# Altium PCB CPU-010.PcbDoc
Units mm, origin at the board's own origin, x right, y up, seen from the top; angles counter-clockwise.
Board outline 44.45 x 44.45 mm, 2 copper layers (Top Layer, Bottom Layer), stack 1.595 mm thick; 64 components, 120 nets, 621 pads, 119 vias.
Unrouted connection lines stored in the file: 367.
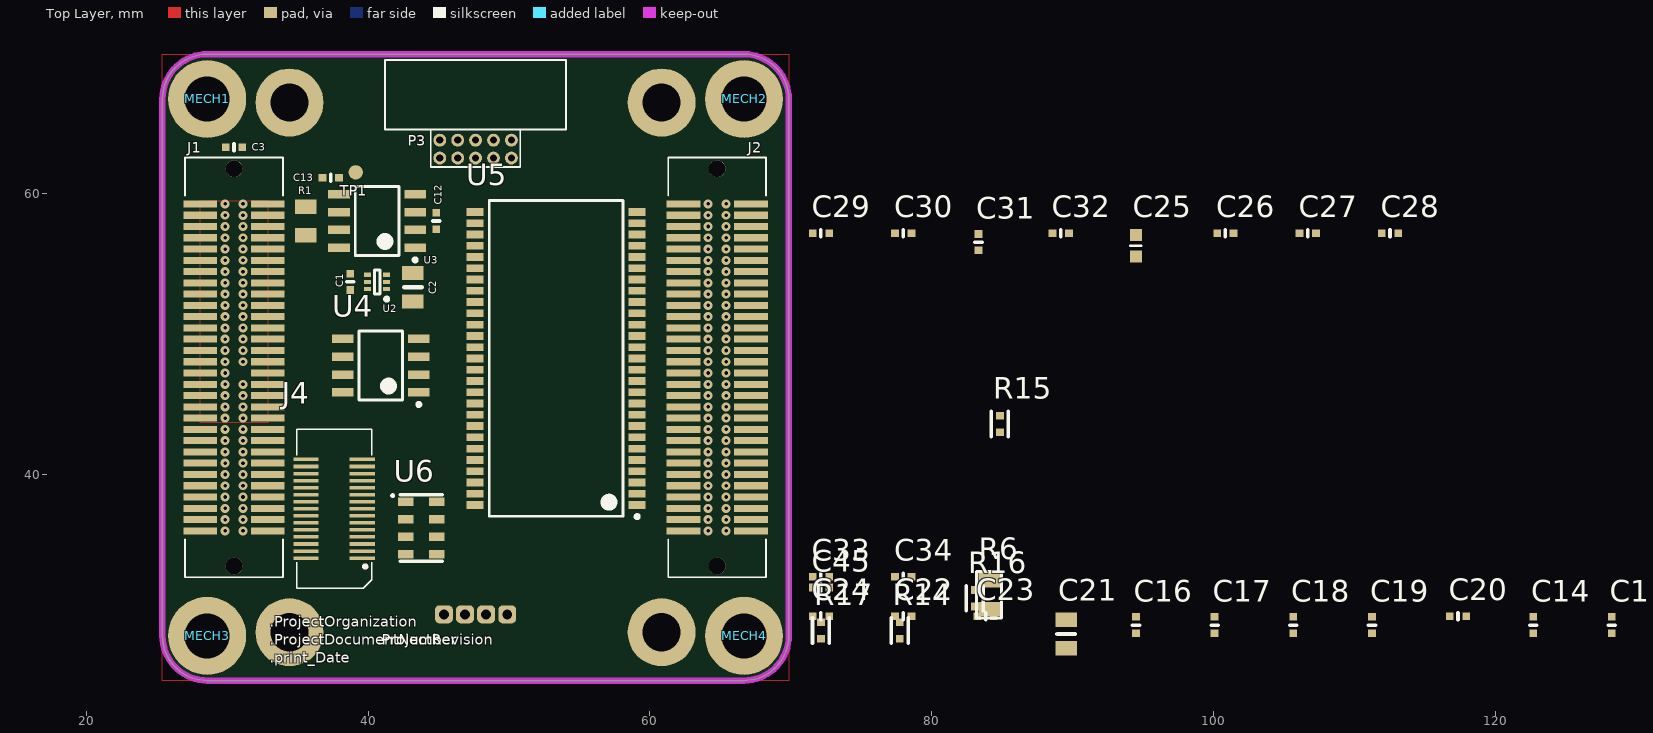
[diagram p0: Top Layer view]
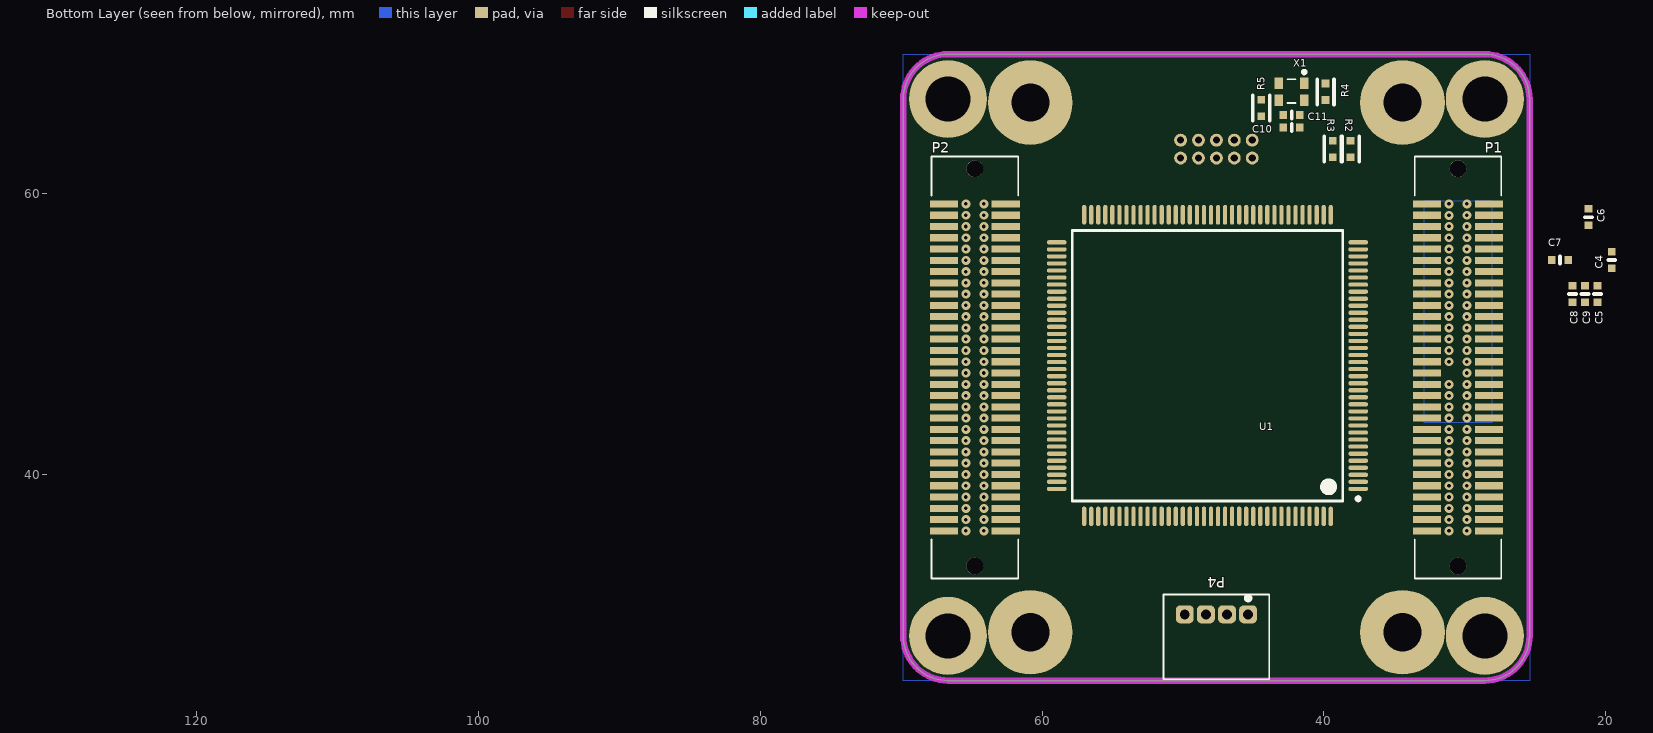
[diagram p1: Bottom Layer view, seen from below]

## Layer stack, top to bottom
Top Solder: solder mask 0.0254, Solder Resist, Dk 3.5
Top Layer: signal copper 0.0356
Dielectric 1: core 1.524, FR-4, Dk 4.6
Bottom Layer: signal copper 0.0356
Bottom Solder: solder mask 0.0254, Solder Resist, Dk 3.5

## Board outline
25.4,28.575 25.4,66.675 cw(c28.575,66.675) 28.575,69.85 66.675,69.85 cw(c66.675,66.675) 69.85,66.675 69.85,28.575 cw(c66.675,28.575) 66.675,25.4 28.575,25.4 cw(c28.575,28.575)

## Design rules (kind name [scope] priority, off if disabled: settings)
AssemblyTestPointUsage AssemblyTestPointUsage_1 [All] p2:
AssemblyTestpoint AssemblyTestpoint_1 [All] p2: testpointundercomponent=TRUE minsize=1.016 maxsize=2.54 preferedsize=1.524 minholesize=0 maxholesize=1.016 preferedholesize=0.813 testpointgrid=0.025 usegrid=TRUE gridtolerance=0 allowsidetop=TRUE allowsidebottom=TRUE
Clearance [All] p1: gap=0.152 ignorepadtopadclearanceinfootprint=FALSE except(0: Arc-Hole Track-Hole SMDPad-Hole THPad-Hole Via-Hole Fill-Hole Poly-Hole Region-Hole Text-Hole)
ComponentClearance [All] p1: gap=0.254 collisioncheckmode=3 verticalgap=0.127 showdistances=FALSE
DiffPairsRouting [All] p1: maxlimit=0.152 minlimit=0.152 mostfreqgap=0.152 toplayer_minwidth=0.508 toplayer_maxwidth=0.508 toplayer_prefwidth=0.508 bottomlayer_minwidth=0.508 bottomlayer_maxwidth=0.508 bottomlayer_prefwidth=0.508 maxuncoupledlength=12.7
FabricationTestPointUsage FabricationTestPointUsage_1 [All] p2: valid=0 allowmultiple=FALSE
FabricationTestpoint FabricationTestpoint_1 [All] p2: side=3 testpointundercomponent=TRUE minsize=1.016 maxsize=2.54 preferedsize=1.524 minholesize=0 maxholesize=1.016 preferedholesize=0.813 testpointgrid=0.025 allowsidetop=TRUE allowsidebottom=TRUE usegrid=TRUE gridtolerance=0
Height Height_Bottom [TouchesRoom('BoardHeight_Bottom') and OnBottom and not ((Name='J1') or (Name='J2') or (Name='P1') or (Name='P2') )] p1: minheight=0 maxheight=3.861 prefheight=0
Height Height_Top [TouchesRoom('BoardHeight_Top') and OnTop and not ((Name='J1') or (Name='J2') or (Name='P1') or (Name='P2') or Name='Mech*' )] p2: minheight=0 maxheight=15.875 prefheight=0
HoleSize [All] p1: absolutevalues=TRUE maxlimit=3.302 minlimit=0.254 maxpercent=80.000 minpercent=20.000
MinimumSolderMaskSliver [All] p1: minsoldermaskwidth=0.076
PolygonConnect [All] p1: thpad.connectstyle=Relief thpad.reliefconductorwidth=0.152 thpad.reliefentries=4 thpad.polygonreliefangle="90 Angle" thpad.airgapwidth=0.152 smdpad.connectstyle=Relief smdpad.reliefconductorwidth=0.152 smdpad.reliefentries=4 smdpad.polygonreliefangle="90 Angle" smdpad.airgapwidth=0.152 via.connectstyle=Direct via.reliefconductorwidth=0.254 via.reliefentries=4 via.polygonreliefangle="90 Angle" via.airgapwidth=0.254
RoomDefinition BoardHeight_Bottom [False] p1: confinementstyle=ConfineIn formatcopy=TRUE lockcomponents=FALSE outline 25.4,69.85 69.85,69.85 69.85,25.4 25.4,25.4
RoomDefinition BoardHeight_Top [False] p2: confinementstyle=ConfineIn formatcopy=TRUE lockcomponents=FALSE outline 69.85,69.85 25.4,69.85 25.4,25.4 69.85,25.4
RoutingVias [All] p1: holewidth=0.254 width=0.635 viastyle="Through Hole" minholewidth=0.254 minwidth=0.635 maxholewidth=0.711 maxwidth=1.27
SilkToBoardRegionClearance SilkToBoardRegionClearance_1 [All] p2:
SilkToSilkClearance [All] p1: silktosilkclearance=0.051
SilkToSolderMaskClearance [IsPad] p1: minsilkscreentomaskgap=0.102 clearancetoexposedcopper=TRUE
SolderMaskExpansion [All] p1: expansion=0.051 istentingtop=FALSE
UnRoutedNet [All] p1: checkbadconnections=TRUE
Width "Schematic Width Constraint_1" [InNet('XTAL')] p1: maxlimit=0.254 minlimit=0.254 preferedwidth=0.254
Width "Schematic Width Constraint" [InNet('NetR5_1')] p2: maxlimit=0.254 minlimit=0.254 preferedwidth=0.254
Width Width_1 [All] p3: maxlimit=2.54 minlimit=0.152 preferedwidth=0.254
22 further rules are at their usual default settings.

## Classes and differential pairs
component class Connectors: C3 C12 C13 J1 J2 P1 P2 P4 R1 U3
component class Power: C4 C5 C6 C7 C8 C9
differential pair CAN1: +CAN1_P -CAN1_N
differential pair CAN0: +CAN0_P -CAN0_N

## Components (designator, comment, footprint, x,y, rotation, side; value= is the part's Value field where it differs from the comment)
C1 "1µF" SMD-0402C 38.735,53.696 r0 top
C2 "4.7µF" SMD-0805C 43.18,53.315 r180 top
C3 "0.10µF" SMD-0402C 30.48,63.246 r270 top
C4 "0.10µF" SMD-0402C 19.558,55.245 r180 bottom
C5 "0.10µF" SMD-0402C 20.574,52.832 r0 bottom
C6 "0.10µF" SMD-0402C 21.209,58.293 r180 bottom
C7 "0.10µF" SMD-0402C 23.241,55.245 r270 bottom
C8 "0.10µF" SMD-0402C 22.352,52.832 r0 bottom
C9 "0.10µF" SMD-0402C 21.463,52.832 r0 bottom
C10 "0.10µF" SMD-0402C 42.291,64.643 r90 bottom
C11 "10000pF" SMD-0402C 42.291,65.532 r90 bottom
C12 "0.10µF" SMD-0402C 44.831,58.014 r0 top
C13 "0.10µF" SMD-0402C 37.338,61.087 r270 top
C14 "1µF" SMD-0402C 122.682,29.337 r0 top
C15 "0.10µF" SMD-0402C 128.27,29.337 r0 top
C16 "0.10µF" SMD-0402C 94.488,29.337 r0 top
C17 "0.10µF" SMD-0402C 100.076,29.337 r0 top
C18 "0.10µF" SMD-0402C 105.664,29.337 r0 top
C19 "0.10µF" SMD-0402C 111.252,29.337 r0 top
C20 "0.10µF" SMD-0402C 117.348,29.972 r90 top
C21 "4.7µF" SMD-0805C 89.535,28.702 r0 top
C22 "0.10µF" SMD-0402C 77.978,29.972 r90 top
C23 "0.10µF" SMD-0402C 83.82,29.972 r90 top
C24 "0.10µF" SMD-0402C 72.136,29.972 r90 top
C25 "2.2µF" SMD-0603C 94.488,56.261 r0 top
C26 "0.10µF" SMD-0402C 100.838,57.15 r90 top
C27 "0.10µF" SMD-0402C 106.68,57.15 r90 top
C28 "0.10µF" SMD-0402C 112.522,57.15 r90 top
C29 "0.10µF" SMD-0402C 72.136,57.15 r90 top
C30 "0.10µF" SMD-0402C 77.978,57.15 r90 top
C31 "0.10µF" SMD-0402C 83.312,56.515 r0 top
C32 "0.10µF" SMD-0402C 89.154,57.15 r90 top
C33 "0.10µF" SMD-0402C 72.136,32.766 r90 top
C34 "0.10µF" SMD-0402C 77.978,32.766 r90 top
C45 "0.10µF" SMD-0402C 72.136,32.004 r90 top
J1 "10144517-064802LF" 10144517-064802LF 30.48,47.625 r90 top locked
J2 "10144517-064802LF" 10144517-064802LF 64.77,47.625 r90 top locked
J4 "52991-0308" 529910308 37.592,37.592 r90 top
MECH1 "M2115-3005-SS" M2115-3005-SS 28.575,66.675 r0 top
MECH2 "M2115-3005-SS" M2115-3005-SS 66.675,66.675 r0 top
MECH3 "M2115-3005-SS" M2115-3005-SS 28.575,28.575 r0 top
MECH4 "M2115-3005-SS" M2115-3005-SS 66.675,28.575 r0 top
P1 "10144518-064802LF" 10144518-064802LF 30.48,47.625 r270 bottom locked
P2 "10144518-064802LF" 10144518-064802LF 64.77,47.625 r270 bottom locked
P3 "2x5_0.05_SWD" 2X5_0.05_R 47.625,62.484 r180 top
P4 "S4B-ZR(LF)(SN)" S4B-ZR(LF)(SN) 47.625,25.499 r180 bottom
R1 "120" SMD-0805-RES 35.56,58.014 r180 top
R2 "10k" SMD-0402-RES 38.1,63.119 r180 bottom
R3 "1k" SMD-0402-RES 39.37,63.119 r180 bottom
R4 "1k" SMD-0402-RES 39.878,67.183 r180 bottom
R5 "22" SMD-0402-RES 44.45,66.04 r180 bottom
R6 "120" SMD-0805-RES 84.074,31.496 r0 top
R14 "4.7k" SMD-0402-RES 77.724,28.956 r0 top
R15 "4.7k" SMD-0402-RES 84.836,43.612 r0 top
R16 "22" SMD-0402-RES 83.058,31.242 r0 top
R17 "22" SMD-0402-RES 72.136,28.956 r0 top
TP1 "TP" TP_SMD_40 39.116,61.468 r90 top
U1 "ATSAMV71Q19B-AAB" TSQFP50P2200X2200X160-144N 48.26,47.752 r0 bottom
U2 "NCV8170AXV330T2G" SOTFL50P160X60-6N 40.64,53.696 r180 top
U3 "ATA6561-GAQW" SOIC127P600X175-8N 40.64,58.014 r180 top
U4 "ATA6561-GAQW" SOIC127P600X175-8N 40.894,47.752 r180 top
U5 "IS45S16800F-7TLA2" TSOP80P1180X120-54N 53.34,48.26 r180 top
U6 "MS561101BA03-50" MS561101BA03-50 43.772,36.225 r0 top
X1 "MC2016K30.0000C16ESH" MC2016 42.291,67.183 r0 bottom

## Footprints (in the part's own frame and the unit in brackets; to place one, negate y for a bottom-side part, rotate by r counter-clockwise, add the part's x,y. Pads: shape width x height; smd on the part's side, far side on the other; paste and mask are expansions set on the pad)
2X5_0.05_R [mil]
  round 36 hole 20: 1(100,0) 2(100,-50) 3(50,0) 4(50,-50) 5(0,0) 6(0,-50) 8(-50,-50) 9(-100,0) 10(-100,-50)
  round 36 hole 20 mask+4: 7(-50,0)
  silkscreen extent -253,-274 253,25, body extent -250,-274 250,8, height 198
10144517-064802LF [mm]
  rect 0.5x2.4 smd: 1(11.6,2.4) 2(11.6,-2.4) 3(10.8,2.4) 4(10.8,-2.4) 5(10,2.4) 6(10,-2.4) 7(9.2,2.4) 8(9.2,-2.4) 9(8.4,2.4) 10(8.4,-2.4) 11(7.6,2.4) 12(7.6,-2.4) 13(6.8,2.4) 14(6.8,-2.4) 15(6,2.4) 16(6,-2.4) 17(5.2,2.4) 18(5.2,-2.4) 19(4.4,2.4) 20(4.4,-2.4) 21(3.6,2.4) 22(3.6,-2.4) 23(2.8,2.4) 24(2.8,-2.4) 25(2,2.4) 26(2,-2.4) 27(1.2,2.4) 28(1.2,-2.4) 29(0.4,2.4) 30(0.4,-2.4) 31(-0.4,2.4) 32(-0.4,-2.4) 33(-1.2,2.4) 34(-1.2,-2.4) 35(-2,2.4) 36(-2,-2.4) 37(-2.8,2.4) 38(-2.8,-2.4) 39(-3.6,2.4) 40(-3.6,-2.4) 41(-4.4,2.4) 42(-4.4,-2.4) 43(-5.2,2.4) 44(-5.2,-2.4) 45(-6,2.4) 46(-6,-2.4) 47(-6.8,2.4) 48(-6.8,-2.4) 49(-7.6,2.4) 50(-7.6,-2.4) 51(-8.4,2.4) 52(-8.4,-2.4) 53(-9.2,2.4) 54(-9.2,-2.4) 55(-10,2.4) 56(-10,-2.4) 57(-10.8,2.4) 58(-10.8,-2.4) 59(-11.6,2.4) 60(-11.6,-2.4)
  round 1.2 hole 1.2 unplated: M1(14.1,0)
  round 0.8 hole 0.8 unplated: M2(-14.1,0)
  silkscreen extent -14.9,-3.47 14.9,3.47, body extent -14.9,-3.4 14.9,3.4, height 15.65
10144518-064802LF [mm]
  rect 0.5x2 smd: 1(-11.6,2.2) 2(-11.6,-2.2) 3(-10.8,2.2) 4(-10.8,-2.2) 5(-10,2.2) 6(-10,-2.2) 7(-9.2,2.2) 8(-9.2,-2.2) 9(-8.4,2.2) 10(-8.4,-2.2) 11(-7.6,2.2) 12(-7.6,-2.2) 13(-6.8,2.2) 14(-6.8,-2.2) 15(-6,2.2) 16(-6,-2.2) 17(-5.2,2.2) 18(-5.2,-2.2) 19(-4.4,2.2) 20(-4.4,-2.2) 21(-3.6,2.2) 22(-3.6,-2.2) 23(-2.8,2.2) 24(-2.8,-2.2) 25(-2,2.2) 26(-2,-2.2) 27(-1.2,2.2) 28(-1.2,-2.2) 29(-0.4,2.2) 30(-0.4,-2.2) 31(0.4,2.2) 32(0.4,-2.2) 33(1.2,2.2) 34(1.2,-2.2) 35(2,2.2) 36(2,-2.2) 37(2.8,2.2) 38(2.8,-2.2) 39(3.6,2.2) 40(3.6,-2.2) 41(4.4,2.2) 42(4.4,-2.2) 43(5.2,2.2) 44(5.2,-2.2) 45(6,2.2) 46(6,-2.2) 47(6.8,2.2) 48(6.8,-2.2) 49(7.6,2.2) 50(7.6,-2.2) 51(8.4,2.2) 52(8.4,-2.2) 53(9.2,2.2) 54(9.2,-2.2) 55(10,2.2) 56(10,-2.2) 57(10.8,2.2) 58(10.8,-2.2) 59(11.6,2.2) 60(11.6,-2.2)
  round 1.2 hole 1.2 unplated: M2(14.1,0)
  silkscreen extent -14.97,-3.08 14.97,3.08, body extent -14.9,-3 14.9,3, height 7.65
529910308 [mm]
  rect 0.25x1.8 smd: 1(-3.5,-2) 2(-3.5,2) 3(-3,-2) 4(-3,2) 5(-2.5,-2) 6(-2.5,2) 7(-2,-2) 8(-2,2) 9(-1.5,-2) 10(-1.5,2) 11(-1,-2) 12(-1,2) 13(-0.5,-2) 14(-0.5,2) 15(0,-2) 16(0,2) 17(0.5,-2) 18(0.5,2) 19(1,-2) 20(1,2) 21(1.5,-2) 22(1.5,2) 23(2,-2) 24(2,2) 25(2.5,-2) 26(2.5,2) 27(3,-2) 28(3,2) 29(3.5,-2) 30(3.5,2)
  silkscreen extent -5.65,-2.65 5.65,2.65, body extent -5.65,-2.7 5.65,2.7, height 2.33
M2115-3005-SS [mm]
  body extent -2.25,-2.59 2.25,2.59, height 20
MC2016 [mm]
  rect 0.6x0.8 smd: 1(-0.9,-0.6) 2(0.9,-0.6) 3(0.9,0.6) 4(-0.9,0.6)
  silkscreen extent -1,-1.5 0.3,0.8, body extent -1,-0.8 1,0.8, height 0.4
MS561101BA03-50 [mm]
  rect 1.1x0.6 smd: 1(-1.1,1.875) 2(-1.1,0.625) 3(-1.1,-0.625) 4(-1.1,-1.875) 5(1.1,-1.875) 6(1.1,-0.625) 7(1.1,0.625) 8(1.1,1.875)
  silkscreen extent -2.08,-2.35 1.5,2.35, body extent -1.5,-2.5 1.5,2.5, height 1
S4B-ZR(LF)(SN) [mm]
  rrect50% 1.27x1.27 hole 0.7: 1(2.25,4.6) 2(0.75,4.6) 3(-0.75,4.6) 4(-2.25,4.6)
  silkscreen extent -3.75,0 3.75,6, body extent -3.75,0 3.75,6, height 3.7
SMD-0402-RES [mm]
  rect 0.55x0.55 smd: 1(0,0.584) 2(0,-0.584)
  silkscreen extent -0.6,-0.9 0.6,0.9, body extent -0.27,-0.57 0.28,0.58, height 0.41
SMD-0402C [mm]
  rect 0.55x0.55 smd: 1(0,0.584) 2(0,-0.584)
  silkscreen extent -0.25,0 0.25,0, body extent -0.25,-0.51 0.25,0.51, height 0.51
SMD-0603C [mm]
  rect 0.85x0.85 smd: 1(0,0.775) 2(0,-0.775)
  silkscreen extent -0.4,0 0.4,0, body extent -0.4,-0.8 0.4,0.8, height 0.9
SMD-0805-RES [mil]
  rect 60x40 smd: 1(0,40) 2(0,-40)
  body extent -24,-39 26,39, height 31
SMD-0805C [mil]
  rect 60x40 smd: 1(0,40) 2(0,-40)
  silkscreen extent -25,0 25,0, body extent -25,-39 25,39, height 35
SOIC127P600X175-8N [mm] "SOIC, 8-Leads, Body 4.90x3.90mm, Pitch 1.27mm, IPC Medium Density"
  rect 1.55x0.6 smd: 1(-2.7,1.905) 2(-2.7,0.635) 3(-2.7,-0.635) 4(-2.7,-1.905) 5(2.7,-1.905) 6(2.7,-0.635) 7(2.7,0.635) 8(2.7,1.905)
  silkscreen extent -2.83,-2.45 1.55,2.88, body extent -3,-2.45 3,2.45, height 1.75
SOTFL50P160X60-6N [mm] "SOTFL, 6-Leads, Body 1.60x1.60mm, Pitch 0.50mm, IPC Medium Density"
  rect 0.5x0.3 smd mask+0.051: 1(-0.675,0.5) 2(-0.675,0) 3(-0.675,-0.5) 4(0.675,-0.5) 5(0.675,0) 6(0.675,0.5)
  silkscreen extent -0.8,-0.85 0.2,1.35, body extent -0.8,-0.85 0.8,0.85, height 0.6
TP_SMD_40 [mil]
  round 40 smd: 1(0,0)
TSOP80P1180X120-54N [mm] "TSOP, 54-Leads, Body 22.22x10.16mm, Pitch 0.80mm, IPC Medium Density"
  rect 1.2x0.55 smd: 1(-5.75,10.4) 2(-5.75,9.6) 3(-5.75,8.8) 4(-5.75,8) 5(-5.75,7.2) 6(-5.75,6.4) 7(-5.75,5.6) 8(-5.75,4.8) 9(-5.75,4) 10(-5.75,3.2) 11(-5.75,2.4) 12(-5.75,1.6) 13(-5.75,0.8) 14(-5.75,0) 15(-5.75,-0.8) 16(-5.75,-1.6) 17(-5.75,-2.4) 18(-5.75,-3.2) 19(-5.75,-4) 20(-5.75,-4.8) 21(-5.75,-5.6) 22(-5.75,-6.4) 23(-5.75,-7.2) 24(-5.75,-8) 25(-5.75,-8.8) 26(-5.75,-9.6) 27(-5.75,-10.4) 28(5.75,-10.4) 29(5.75,-9.6) 30(5.75,-8.8) 31(5.75,-8) 32(5.75,-7.2) 33(5.75,-6.4) 34(5.75,-5.6) 35(5.75,-4.8) 36(5.75,-4) 37(5.75,-3.2) 38(5.75,-2.4) 39(5.75,-1.6) 40(5.75,-0.8) 41(5.75,0) 42(5.75,0.8) 43(5.75,1.6) 44(5.75,2.4) 45(5.75,3.2) 46(5.75,4) 47(5.75,4.8) 48(5.75,5.6) 49(5.75,6.4) 50(5.75,7.2) 51(5.75,8) 52(5.75,8.8) 53(5.75,9.6) 54(5.75,10.4)
  silkscreen extent -5.88,-11.2 4.75,11.35, body extent -5.15,-11.2 5.15,11.2, height 1.2
TSQFP50P2200X2200X160-144N [mm] "TSQFP, 144-Leads, Body 20.00x20.00mm, Pitch 0.50mm, IPC Medium Density"
  oval 1.4x0.3 smd: 1(-10.7,8.75) 2(-10.7,8.25) 3(-10.7,7.75) 4(-10.7,7.25) 5(-10.7,6.75) 6(-10.7,6.25) 7(-10.7,5.75) 8(-10.7,5.25) 9(-10.7,4.75) 10(-10.7,4.25) 11(-10.7,3.75) 12(-10.7,3.25) 13(-10.7,2.75) 14(-10.7,2.25) 15(-10.7,1.75) 16(-10.7,1.25) 17(-10.7,0.75) 18(-10.7,0.25) 19(-10.7,-0.25) 20(-10.7,-0.75) 21(-10.7,-1.25) 22(-10.7,-1.75) 23(-10.7,-2.25) 24(-10.7,-2.75) 25(-10.7,-3.25) 26(-10.7,-3.75) 27(-10.7,-4.25) 28(-10.7,-4.75) 29(-10.7,-5.25) 30(-10.7,-5.75) 31(-10.7,-6.25) 32(-10.7,-6.75) 33(-10.7,-7.25) 34(-10.7,-7.75) 35(-10.7,-8.25) 36(-10.7,-8.75) 73(10.7,-8.75) 74(10.7,-8.25) 75(10.7,-7.75) 76(10.7,-7.25) 77(10.7,-6.75) 78(10.7,-6.25) 79(10.7,-5.75) 80(10.7,-5.25) 81(10.7,-4.75) 82(10.7,-4.25) 83(10.7,-3.75) 84(10.7,-3.25) 85(10.7,-2.75) 86(10.7,-2.25) 87(10.7,-1.75) 88(10.7,-1.25) 89(10.7,-0.75) 90(10.7,-0.25) 91(10.7,0.25) 92(10.7,0.75) 93(10.7,1.25) 94(10.7,1.75) 95(10.7,2.25) 96(10.7,2.75) 97(10.7,3.25) 98(10.7,3.75) 99(10.7,4.25) 100(10.7,4.75) 101(10.7,5.25) 102(10.7,5.75) 103(10.7,6.25) 104(10.7,6.75) 105(10.7,7.25) 106(10.7,7.75) 107(10.7,8.25) 108(10.7,8.75)
  oval 0.3x1.4 smd: 37(-8.75,-10.7) 38(-8.25,-10.7) 39(-7.75,-10.7) 40(-7.25,-10.7) 41(-6.75,-10.7) 42(-6.25,-10.7) 43(-5.75,-10.7) 44(-5.25,-10.7) 45(-4.75,-10.7) 46(-4.25,-10.7) 47(-3.75,-10.7) 48(-3.25,-10.7) 49(-2.75,-10.7) 50(-2.25,-10.7) 51(-1.75,-10.7) 52(-1.25,-10.7) 53(-0.75,-10.7) 54(-0.25,-10.7) 55(0.25,-10.7) 56(0.75,-10.7) 57(1.25,-10.7) 58(1.75,-10.7) 59(2.25,-10.7) 60(2.75,-10.7) 61(3.25,-10.7) 62(3.75,-10.7) 63(4.25,-10.7) 64(4.75,-10.7) 65(5.25,-10.7) 66(5.75,-10.7) 67(6.25,-10.7) 68(6.75,-10.7) 69(7.25,-10.7) 70(7.75,-10.7) 71(8.25,-10.7) 72(8.75,-10.7) 109(8.75,10.7) 110(8.25,10.7) 111(7.75,10.7) 112(7.25,10.7) 113(6.75,10.7) 114(6.25,10.7) 115(5.75,10.7) 116(5.25,10.7) 117(4.75,10.7) 118(4.25,10.7) 119(3.75,10.7) 120(3.25,10.7) 121(2.75,10.7) 122(2.25,10.7) 123(1.75,10.7) 124(1.25,10.7) 125(0.75,10.7) 126(0.25,10.7) 127(-0.25,10.7) 128(-0.75,10.7) 129(-1.25,10.7) 130(-1.75,10.7) 131(-2.25,10.7) 132(-2.75,10.7) 133(-3.25,10.7) 134(-3.75,10.7) 135(-4.25,10.7) 136(-4.75,10.7) 137(-5.25,10.7) 138(-5.75,10.7) 139(-6.25,10.7) 140(-6.75,10.7) 141(-7.25,10.7) 142(-7.75,10.7) 143(-8.25,10.7) 144(-8.75,10.7)
  silkscreen extent -10.82,-9.6 9.6,9.6, body extent -11,-11 11,11, height 1.6

## Part data
C1 C14: library part GCM155C71A105KE38D, "CAP CER 1UF 10V X7S 0402", Digi-Key Part Number=490-13409-1-ND, Manufacturer="Murata Electronics North America", Operating Temperature="-55°C ~ 125°C", Package / Case="0402 (1005 Metric)", Ratings=AEC-Q200, Temperature Coefficient=X7S, Tolerance=±10%, Voltage=10V, @ qty=0, Applications=Automotive, Datasheets=http://www.murata.com/~/media/webrenewal/support/library/catalog/products/capacitor/mlcc/c03e.ashx, Factory Stock=0, Features=-, Height - Seated (Max)=-, Image=//media.digikey.com/Renders/Murata%20Renders/ZRB-SERIES-0402.jpg, Lead Spacing=-, Lead Style=-, Minimum Quantity=1, Mounting Type="Surface Mount, MLCC", Packaging="Cut Tape (CT)", Part Number=GCM155C71A105KE38D, Part Status=Active, Quantity Available=7240, Series=GCM, Size / Dimension="0.039\" L x 0.020\" W (1.00mm x 0.50mm)", Thickness (Max)="0.022\" (0.55mm)", Unit Price (USD)=0.12
C2 C21: library part GCJ21BR71C475KA01L, "CAP CER 4.7UF 16V X7R 0805", Digi-Key Part Number=490-10557-1-ND, Manufacturer="Murata Electronics North America", Operating Temperature="-55°C ~ 125°C", Package / Case="0805 (2012 Metric)", Ratings=AEC-Q200, Temperature Coefficient=X7R, Tolerance=±10%, Voltage=16V, @ qty=0, Applications="Automotive, Boardflex Sensitive", Datasheets=http://www.murata.com/~/media/webrenewal/support/library/catalog/products/capacitor/mlcc/c03e.ashx, Factory Stock=0, Features="Soft Termination", Height - Seated (Max)=-, Image=//media.digikey.com/Renders/Murata%20Renders/0805%20(2012%20Metric)%20.85mm.jpg, Lead Spacing=-, Lead Style=-, Minimum Quantity=1, Mounting Type="Surface Mount, MLCC", Packaging="Cut Tape (CT)", Part Number=GCJ21BR71C475KA01L, Part Status=Active, Quantity Available=53217, Series=GCJ, Size / Dimension="0.079\" L x 0.049\" W (2.00mm x 1.25mm)", Thickness (Max)="0.057\" (1.45mm)", Unit Price (USD)=0.44
C3 C4 C5 C6 C7 C8 C9 C10 C12 C13 C15 C16 C17 C18 C19 C20 C22 C23 C24 C26 C27 C28 C29 C30 C31 C32 C33 C34 C45: library part GCM155R71C104KA55D, "CAP CER 0.1UF 16V X7R 0402", Digi-Key Part Number=490-4759-1-ND, Manufacturer="Murata Electronics North America", Operating Temperature="-55°C ~ 125°C", Package / Case="0402 (1005 Metric)", Ratings=AEC-Q200, Temperature Coefficient=X7R, Tolerance=±10%, Voltage=16V, @ qty=0, Applications=Automotive, Datasheets=http://www.murata.com/~/media/webrenewal/support/library/catalog/products/capacitor/mlcc/c03e.ashx, Factory Stock=0, Features=-, Height - Seated (Max)=-, Image=//media.digikey.com/Renders/Murata%20Renders/ZRB-SERIES-0402.jpg, Lead Spacing=-, Lead Style=-, Minimum Quantity=1, Mounting Type="Surface Mount, MLCC", Packaging="Cut Tape (CT)", Part Number=GCM155R71C104KA55D, Part Status=Active, Quantity Available=734194, Series=GCM, Size / Dimension="0.039\" L x 0.020\" W (1.00mm x 0.50mm)", Thickness (Max)="0.022\" (0.55mm)", Unit Price (USD)=0.1
C11: library part GCM155R71E103KA37D, "CAP CER 10000PF 25V X7R 0402", Digi-Key Part Number=490-6043-1-ND, Manufacturer="Murata Electronics North America", Operating Temperature="-55°C ~ 125°C", Package / Case="0402 (1005 Metric)", Ratings=AEC-Q200, Temperature Coefficient=X7R, Tolerance=±10%, Voltage=25V, @ qty=0, Applications=Automotive, Datasheets=http://www.murata.com/~/media/webrenewal/support/library/catalog/products/capacitor/mlcc/c03e.ashx, Factory Stock=0, Features=-, Height - Seated (Max)=-, Image=//media.digikey.com/Renders/Murata%20Renders/ZRB-SERIES-0402.jpg, Lead Spacing=-, Lead Style=-, Minimum Quantity=1, Mounting Type="Surface Mount, MLCC", Packaging="Cut Tape (CT)", Part Number=GCM155R71E103KA37D, Part Status=Active, Quantity Available=128782, Series=GCM, Size / Dimension="0.039\" L x 0.020\" W (1.00mm x 0.50mm)", Thickness (Max)="0.022\" (0.55mm)", Unit Price (USD)=0.1
C25: library part GCM188R70J225KE22D, "CAP CER 2.2UF 6.3V X7R 0603", Digi-Key Part Number=490-5316-1-ND, Manufacturer="Murata Electronics North America", Operating Temperature="-55°C ~ 125°C", Package / Case="0603 (1608 Metric)", Ratings=AEC-Q200, Temperature Coefficient=X7R, Tolerance=±10%, Voltage=6.3V, @ qty=0, Applications=Automotive, Datasheets=http://www.murata.com/~/media/webrenewal/support/library/catalog/products/capacitor/mlcc/c03e.ashx, Factory Stock=0, Features=-, Height - Seated (Max)=-, Image=//media.digikey.com/Renders/Murata%20Renders/0603%28GCM188%29.jpg, Lead Spacing=-, Lead Style=-, Minimum Quantity=1, Mounting Type="Surface Mount, MLCC", Packaging="Cut Tape (CT)", Part Number=GCM188R70J225KE22D, Part Status=Active, Quantity Available=20695, Series=GCM, Size / Dimension="0.063\" L x 0.031\" W (1.60mm x 0.80mm)", Thickness (Max)="0.035\" (0.90mm)", Unit Price (USD)=0.23
J4: "Connector", Manufacturer_Name=Molex, Datasheet Link=https://www.molex.com/pdm_docs/sd/529910308_sd.pdf, Height=2.47mm, Manufacturer_Part_Number=52991-0308, Unit Price (USD)=1.43
R1 R6: library part ERJ-P6WJ121V, "RES SMD 120 OHM 5% 1/2W 0805", Digi-Key Part Number=P16943CT-ND, Manufacturer="Panasonic Electronic Components", Operating Temperature="-55°C ~ 155°C", Package / Case="0805 (2012 Metric)", Power (Watts)="0.5W, 1/2W", Supplier Device Package=0805, Temperature Coefficient=±200ppm/°C, Tolerance=±5%, @ qty=1500, Composition="Thick Film", Datasheets=https://industrial.panasonic.com/cdbs/www-data/pdf/RDA0000/AOA0000C243.pdf, Factory Stock=0, Failure Rate=-, Features="Automotive AEC-Q200, Pulse Withstanding", Height - Seated (Max)="0.030\" (0.75mm)", Image=//media.digikey.com/Renders/Panasonic%20Renders/ERJ-0805%20Pkg.jpg, Minimum Quantity=1, Number of Terminations=2, Packaging="Cut Tape (CT)", Part Number=ERJ-P6WJ121V, Part Status=Active, Quantity Available=4133, Series=ERJ, Size / Dimension="0.079\" L x 0.049\" W (2.00mm x 1.25mm)", Unit Price (USD)=0.08237
R2: library part ERJ-2GEJ103X, "RES SMD 10K OHM 5% 1/10W 0402", Digi-Key Part Number=P10KJCT-ND, Manufacturer="Panasonic Electronic Components", Operating Temperature="-55°C ~ 155°C", Package / Case="0402 (1005 Metric)", Power (Watts)="0.1W, 1/10W", Supplier Device Package=0402, Temperature Coefficient=±200ppm/°C, Tolerance=±5%, @ qty=1500, Composition="Thick Film", Datasheets=http://industrial.panasonic.com/www-cgi/jvcr13pz.cgi?E+PZ+3+AOA0001+ERJ2GEJ103X+7+WW, Factory Stock=0, Failure Rate=-, Features="Automotive AEC-Q200", Height - Seated (Max)="0.016\" (0.40mm)", Image=//media.digikey.com/Photos/Panasonic%20Photos/ERJ-PA2-Series.jpg, Minimum Quantity=1, Number of Terminations=2, Packaging="Cut Tape (CT)", Part Number=ERJ-2GEJ103X, Part Status=Active, Quantity Available=2560215, Series=ERJ, Size / Dimension="0.039\" L x 0.020\" W (1.00mm x 0.50mm)", Unit Price (USD)=0.00350
R3 R4: library part ERJ-2GEJ102X, "RES SMD 1K OHM 5% 1/10W 0402", Digi-Key Part Number=P1.0KJCT-ND, Manufacturer="Panasonic Electronic Components", Operating Temperature="-55°C ~ 155°C", Package / Case="0402 (1005 Metric)", Power (Watts)="0.1W, 1/10W", Supplier Device Package=0402, Temperature Coefficient=±200ppm/°C, Tolerance=±5%, @ qty=1500, Composition="Thick Film", Datasheets=http://industrial.panasonic.com/www-cgi/jvcr13pz.cgi?E+PZ+3+AOA0001+ERJ2GEJ102X+7+WW, Factory Stock=0, Failure Rate=-, Features="Automotive AEC-Q200", Height - Seated (Max)="0.016\" (0.40mm)", Image=//media.digikey.com/Photos/Panasonic%20Photos/ERJ-PA2-Series.jpg, Minimum Quantity=1, Number of Terminations=2, Packaging="Cut Tape (CT)", Part Number=ERJ-2GEJ102X, Part Status=Active, Quantity Available=1939857, Series=ERJ, Size / Dimension="0.039\" L x 0.020\" W (1.00mm x 0.50mm)", Unit Price (USD)=0.00350
R5 R16 R17: library part ERJ-2RKF22R0X, "RES SMD 22 OHM 1% 1/10W 0402", Digi-Key Part Number=P22.0LCT-ND, Manufacturer="Panasonic Electronic Components", Operating Temperature="-55°C ~ 155°C", Package / Case="0402 (1005 Metric)", Power (Watts)="0.1W, 1/10W", Supplier Device Package=0402, Temperature Coefficient=±100ppm/°C, Tolerance=±1%, @ qty=1500, Composition="Thick Film", Datasheets=http://industrial.panasonic.com/www-cgi/jvcr13pz.cgi?E+PZ+3+AOA0002+ERJ2RKF22R0X+7+WW, Factory Stock=0, Failure Rate=-, Features="Automotive AEC-Q200", Height - Seated (Max)="0.016\" (0.40mm)", Image=//media.digikey.com/Photos/Panasonic%20Photos/ERJ-PA2-Series.jpg, Minimum Quantity=1, Number of Terminations=2, Packaging="Cut Tape (CT)", Part Number=ERJ-2RKF22R0X, Part Status=Active, Quantity Available=620432, Series=ERJ, Size / Dimension="0.039\" L x 0.020\" W (1.00mm x 0.50mm)", Unit Price (USD)=0.00496
R14 R15: library part ERJ-2GEJ472X, "RES SMD 4.7K OHM 5% 1/10W 0402", Digi-Key Part Number=P4.7KJCT-ND, Manufacturer="Panasonic Electronic Components", Operating Temperature="-55°C ~ 155°C", Package / Case="0402 (1005 Metric)", Power (Watts)="0.1W, 1/10W", Supplier Device Package=0402, Temperature Coefficient=±200ppm/°C, Tolerance=±5%, @ qty=1500, Composition="Thick Film", Datasheets=http://industrial.panasonic.com/www-cgi/jvcr13pz.cgi?E+PZ+3+AOA0001+ERJ2GEJ472X+7+WW, Factory Stock=0, Failure Rate=-, Features="Automotive AEC-Q200", Height - Seated (Max)="0.016\" (0.40mm)", Image=//media.digikey.com/Photos/Panasonic%20Photos/ERJ-PA2-Series.jpg, Minimum Quantity=1, Number of Terminations=2, Packaging="Cut Tape (CT)", Part Number=ERJ-2GEJ472X, Part Status=Active, Quantity Available=8551774, Series=ERJ, Size / Dimension="0.039\" L x 0.020\" W (1.00mm x 0.50mm)", Unit Price (USD)=0.00350
J1 J2: Unit Price (USD)=1.95
MECH1 MECH2 MECH3 MECH4: Unit Price (USD)=1.81
P1 P2: Unit Price (USD)=1.52
P3: Unit Price (USD)=0.75
P4: Unit Price (USD)=0.24
U1: Unit Price (USD)=10.74
U2: Unit Price (USD)=0.44
U3 U4: Unit Price (USD)=0.53
U5: Unit Price (USD)=5.18
U6: Unit Price (USD)=12.22
X1: Unit Price (USD)=2.37

## Free pads (board coordinates)
  round 5.537 hole 3.2: 0(28.575,28.575) 0(28.575,66.675) 0(66.675,28.575) 0(66.675,66.675)
  round 4.826 / inner round 4.826 / far side round 6 hole 2.7: 0(34.417,28.829) 0(34.417,66.421) 0(60.833,28.829) 0(60.833,66.421)

## Via types
v1: diameter 0.635, hole 0.254, Top Layer to Bottom Layer, tented both sides, 119 vias

## Nets (pads, with @x,y where several pads share a name; then routed paths per layer and width w, separated by ;. In a path a pad name is that pad's centre, name@x,y a point inside that pad or via, vN(x,y) a via of type N, cw(c..) or ccw(c..) an arc to the next point about the centre after c; other vN are vias at no path point)
+0.9V_REF: J1.42 P1.42
  other v1: 31.115,43.225
+3.3V: C2.2 C4.2 C5.2 C6.2 C7.2 C8.2 C9.2 C10.2 C11.2 C13.1 C23.2 C25.1 C26.2 C27.2 C28.2 C29.2 C30.2 C31.2 C32.2 C34.1 C45.2 J4.23 J4.25 P3.1 P4.1 R2.2 R3.2 R4.2 R14.2 R15.2 TP1.1 U1.5 U1.30 U1.43 U1.72 U1.80 U1.96 U2.3 U3.5 U4.5 U5.1 U5.3 U5.9 U5.14 U5.27 U5.43 U5.49 U6.1 U6.2 X1.4
+5V: C1.2 C12.1 C33.1 J1.46 J1.48 J1.50 J1.52 J1.54 J1.56 J1.58 J1.60 P1.46 P1.48 P1.50 P1.52 P1.54 P1.56 P1.58 P1.60 U2.1 U3.3 U4.3
  other v1: 31.115,36.025 31.115,36.825 31.115,37.625 31.115,38.425 31.115,39.225 31.115,40.025 31.115,40.825 31.115,41.625
+5V_BOOTSTRAP: J1.44 P1.44
  other v1: 31.115,42.425
+5V_Preboot: J1.25 P1.25
  other v1: 29.845,49.625
+12V: J2.1 J2.3 J2.5 J2.7 J2.9 J2.11 J2.13 J2.15 J2.17 J2.19 P2.1 P2.3 P2.5 P2.7 P2.9 P2.11 P2.13 P2.15 P2.17 P2.19
  other v1: 64.135,52.025 64.135,52.825 64.135,53.625 64.135,54.425 64.135,55.225 64.135,56.025 64.135,56.825 64.135,57.625 64.135,58.425 64.135,59.225
+VBAT: J2.21 J2.23 J2.25 J2.27 J2.29 J2.31 J2.33 J2.35 J2.37 J2.39 J2.41 J2.43 J2.45 J2.47 J2.49 J2.51 J2.53 J2.55 J2.57 P2.21 P2.23 P2.25 P2.27 P2.29 P2.31 P2.33 P2.35 P2.37 P2.39 P2.41 P2.43 P2.45 P2.47 P2.49 P2.51 P2.53 P2.55 P2.57
  other v1: 64.135,36.825 64.135,37.625 64.135,38.425 64.135,39.225 64.135,40.025 64.135,40.825 64.135,41.625 64.135,42.425 64.135,43.225 64.135,44.025 64.135,44.825 64.135,45.625 64.135,46.425 64.135,47.225 64.135,48.025 64.135,48.825 64.135,49.625 64.135,50.425 64.135,51.225
+VBAT_Preboot: J2.59 P2.59
  other v1: 64.135,36.025
CAN0_N: J1.4 P1.4 R1.2 U3.6
  other v1: 31.115,58.419
CAN0_P: J1.6 P1.6 R1.1 U3.7
  other v1: 31.115,57.631
CAN0_RX: U1.31 U3.4
CAN0_STBY: U1.99 U3.8
CAN0_TX: U1.26 U3.1
CAN1_N: J1.10 P1.10 R6.2 U4.6
  other v1: 31.115,56.019
CAN1_P: J1.12 P1.12 R6.1 U4.7
  other v1: 31.115,55.231
CAN1_RX: U1.17 U4.4
CAN1_STBY: U1.93 U4.8
CAN1_TX: U1.97 U4.1
CTRL_SYNC: J1.26 P1.26 R16.2
  other v1: 31.115,49.625
DETECT_A: J1.32 U1.68
DRAIN: C3.2 J1.1 J1.2 J1.8 J1.14 J1.20 J1.24 J1.27 J1.28 J1.39 J1.40 P1.1 P1.2 P1.8 P1.14 P1.20 P1.24 P1.27 P1.28 P1.39 P1.40
  other v1: 29.845,44.025 31.115,44.025 29.845,48.825 31.115,48.825 31.115,50.425 31.115,52.025 31.115,54.425 31.115,56.825 29.845,59.225 31.115,59.225
EN_0: J1.34 P1.34
  other v1: 31.115,46.425
EN_1: J1.36 P1.36
  other v1: 31.115,45.625
EN_2: J1.38 P1.38
  other v1: 31.115,44.825
ETH_INT: J4.24 U1.23
ETH_MDC: J4.18 U1.113
ETH_MDIO: J4.20 U1.110
ETH_R\E\S\E\T\: J4.22 U1.90
ETH_RX0: J4.12 U1.125
ETH_RX1: J4.14 U1.121
ETH_RXDV: J4.10 U1.126
ETH_RXER: J4.16 U1.119
ETH_SIGDET: J4.26 U1.129
ETH_TX0: J4.6 U1.131
ETH_TX1: J4.8 U1.128
ETH_TXCK: J4.2 U1.1
ETH_TXEN: J4.4 U1.132
GND: C1.1 C2.1 C3.1 C4.1 C5.1 C6.1 C7.1 C8.1 C9.1 C10.1 C11.1 C12.2 C13.2 C14.1 C15.1 C16.1 C17.1 C18.1 C19.1 C20.1 C21.1 C22.1 C23.1 C24.1 C25.2 C26.1 C27.1 C28.1 C29.1 C30.1 C31.1 C32.1 C33.2 C34.2 C45.1 J1.43 J1.45 J1.47 J1.49 J1.51 J1.53 J1.55 J1.57 J1.59 J2.2 J2.4 J2.6 J2.8 J2.10 J2.12 J2.14 J2.16 J2.18 J2.20 J2.22 J2.24 J2.26 J2.28 J2.30 J2.32 J2.34 J2.36 J2.38 J2.40 J2.42 J2.44 J2.46 J2.48 J2.50 J2.52 J2.54 J2.56 J2.58 J2.60 J4.28 J4.30 P1.43 P1.45 P1.47 P1.49 P1.51 P1.53 P1.55 P1.57 P1.59 P2.2 P2.4 P2.6 P2.8 P2.10 P2.12 P2.14 P2.16 P2.18 P2.20 P2.22 P2.24 P2.26 P2.28 P2.30 P2.32 P2.34 P2.36 P2.38 P2.40 P2.42 P2.44 P2.46 P2.48 P2.50 P2.52 P2.54 P2.56 P2.58 P2.60 P3.3 P3.5 P3.9 P4.2 U1.44 U1.61 U1.95 U1.115 U1.135 U1.138 U2.2 U2.5 U3.2 U4.2 U5.6 U5.12 U5.28 U5.41 U5.46 U5.52 U5.54 U6.3 U6.4 U6.5 X1.2
  other v1: 29.845,36.025 65.405,36.025 29.845,36.825 65.405,36.825 29.845,37.625 65.405,37.625 29.845,38.425 65.405,38.425 29.845,39.225 65.405,39.225 29.845,40.025 65.405,40.025 29.845,40.825 65.405,40.825 29.845,41.625 65.405,41.625 29.845,42.425 65.405,42.425 65.405,43.225 65.405,44.025 65.405,44.825 65.405,45.625 65.405,46.425 65.405,47.225 65.405,48.025 65.405,48.825 65.405,49.625 65.405,50.425 65.405,51.225 65.405,52.025 65.405,52.825 65.405,53.625 65.405,54.425 65.405,55.225 65.405,56.025 65.405,56.825 65.405,57.625 65.405,58.425 65.405,59.225
I2C_SCL: J1.18 P1.18
  other v1: 31.115,52.825
I2C_SDA: J1.16 P1.16
  other v1: 31.115,53.625
MCCDA: J4.3 U1.112
MCCK: J4.1 U1.59
MCDA0: J4.5 U1.116
MCDA1: J4.7 U1.118
MCDA2: J4.9 U1.62
MCDA3: J4.11 U1.70
NetC21_2: C21.2 U1.143
NetC22_2: C22.2 U1.123
NetC24_2: C24.2 U1.139
NetP1_32: P1.32 U1.42
NetP3_2: P3.2
NetP3_4: P3.4 R3.1
NetP3_10: P3.10 R2.1
NetP4_3: P4.3 U1.66
NetP4_4: P4.4 U1.75
NetR4_1: R4.1 X1.1
NetR5_1: R5.1 X1.3
NetR16_1: R16.1 U1.64
NetR17_1: R17.1 U1.51
P_GOOD: J1.30 P1.30 U2.6
  other v1: 31.115,48.025
PPS: J1.22 P1.22 R17.2
  other v1: 31.115,51.225
QSPI_CLK: J1.29 P1.29
  other v1: 29.845,48.025
QSPI_IO0: J1.31 P1.31
  other v1: 29.845,47.225
QSPI_IO1: J1.33 P1.33
  other v1: 29.845,46.425
QSPI_IO2: J1.35 P1.35
  other v1: 29.845,45.625
QSPI_IO3: J1.37 P1.37
  other v1: 29.845,44.825
RAM_A0: U1.120 U5.23
RAM_A1: U1.122 U5.24
RAM_A2: U1.124 U5.25
RAM_A3: U1.127 U5.26
RAM_A4: U1.130 U5.29
RAM_A5: U1.133 U5.30
RAM_A6: U1.13 U5.31
RAM_A7: U1.12 U5.32
RAM_A8: U1.76 U5.33
RAM_A9: U1.16 U5.34
RAM_A11: U1.14 U5.35
RAM_BA0: U1.22 U1.102 U5.20
RAM_BA1: U5.21
RAM_C\S\: U5.19
RAM_CAS: U1.74 U5.17
RAM_D0: U1.11 U5.2
RAM_D1: U1.38 U5.4
RAM_D2: U1.39 U5.5
RAM_D3: U1.40 U5.7
RAM_D4: U1.41 U5.8
RAM_D5: U1.58 U5.10
RAM_D6: U1.54 U5.11
RAM_D7: U1.48 U5.13
RAM_D8: U1.4 U5.42
RAM_D9: U1.6 U5.44
RAM_D10: U1.7 U5.45
RAM_D11: U1.10 U5.47
RAM_D12: U1.27 U5.48
RAM_D13: U1.28 U5.50
RAM_D14: U1.49 U5.51
RAM_D15: U1.45 U5.53
RAM_NBS0: U1.111 U5.39
RAM_NBS1: U1.106 U5.15
RAM_RAS: U1.78 U5.18
RAM_SDA10: U1.88 U5.22
RAM_SDCK: U1.57 U5.38
RAM_SDCKE: U1.84 U5.37
RAM_SDWE: U1.108 U5.16
RFU_3: J1.3 P1.3
  other v1: 29.845,58.425
RFU_5: J1.5 P1.5
  other v1: 29.845,57.625
RFU_7: J1.7 P1.7
  other v1: 29.845,56.825
RFU_9: J1.9 P1.9
  other v1: 29.845,56.025
RFU_11: J1.11 P1.11
  other v1: 29.845,55.225
RFU_13: J1.13 P1.13
  other v1: 29.845,54.425
RFU_15: J1.15 P1.15
  other v1: 29.845,53.625
RFU_17: J1.17 P1.17
  other v1: 29.845,52.825
RFU_19: J1.19 P1.19
  other v1: 29.845,52.025
RFU_21: J1.21 P1.21
  other v1: 29.845,51.225
RFU_23: J1.23 P1.23
  other v1: 29.845,50.425
SCL0: J4.15 R15.1 U1.77 U6.7
SDA0: J4.13 R14.1 U1.91 U6.8
SYNC_0: J1.41 P1.41
  other v1: 29.845,43.225
VDDCORE: C14.2 C15.2 C16.2 C17.2 C18.2 C19.2 C20.2 U1.3 U1.29 U1.33 U1.50 U1.81 U1.107
XTAL: R5.2 U1.142
pads on no net: J1.M1 J1.M2 J2.M1 J2.M2 J4.17 J4.19 J4.21 J4.27 J4.29 P1.M2 P2.M2 P3.6 P3.7 P3.8 U1.2 U1.8 U1.9 U1.15 U1.18 U1.19 U1.20 U1.21 U1.24 U1.25 U1.32 U1.34 U1.35 U1.36 U1.37 U1.46 U1.47 U1.52 U1.53 U1.55 U1.56 U1.60 U1.63 U1.65 U1.67 U1.69 U1.71 U1.73 U1.79 U1.82 U1.83 U1.85 U1.86 U1.87 U1.89 U1.92 U1.94 U1.98 U1.100 U1.101 U1.103 U1.104 U1.105 U1.109 U1.114 U1.117 U1.134 U1.136 U1.137 U1.140 U1.141 U1.144 U2.4 U5.36 U5.40 U6.6

## Polygon pours and split planes (outlines as drawn)
GND on Top Layer "Top Layer-GND" (solid, remove dead copper, shelved, pour order 8): 25.4,69.85 69.85,69.85 69.85,25.4 25.4,25.4
DRAIN on Top Layer "Top Layer-DRAIN" (solid, remove dead copper, shelved, pour order 9): 28.08,59.436 32.88,59.436 32.88,43.688 28.08,43.688
GND on Bottom Layer "Bottom Layer-GND" (solid, remove dead copper, shelved, pour order 7): 69.85,69.85 25.4,69.85 25.4,25.4 69.85,25.4
DRAIN on Bottom Layer "Bottom Layer-DRAIN" (solid, remove dead copper, shelved, pour order 10): 32.88,59.436 28.08,59.436 28.08,43.688 32.88,43.688

## Keep-outs
Keep-Out Layer:
  the board outline again, w0.457

## Other copper
Top Layer:
  rectangle net DRAIN: 28.08,59.225 32.88,59.225
  pour cut-out: 30.776,59.564 30.184,59.564 30.184,59.665 30.776,59.665
  pour cut-out: 30.184,43.686 30.776,43.686 30.776,43.585 30.184,43.585
Bottom Layer:
  pour cut-out: 30.776,43.686 30.184,43.686 30.184,43.585 30.776,43.585
  pour cut-out: 30.184,59.564 30.776,59.564 30.776,59.665 30.184,59.665

## Silkscreen, mask and mechanical layers (free items; w line width, h text height)
Top Overlay:
  text ".ProjectOrganization" at 33.02,29.21 h0.76
  text ".ProjectDocumentNumber" at 33.02,27.94 h0.76
  text ".ProjectRevision" at 40.64,27.94 h0.76
  text ".print_Date" at 33.02,26.67 h0.76
Outline:
  the board outline again, w0.127